# Altium PCB PCBm.PcbDoc
Units mm, origin at the board's own origin, x right, y up, seen from the top; angles counter-clockwise.
Board outline 50 x 50 mm, 2 copper layers (Top Layer, Bottom Layer); 168 components, 12 nets, 420 pads, 0 vias.
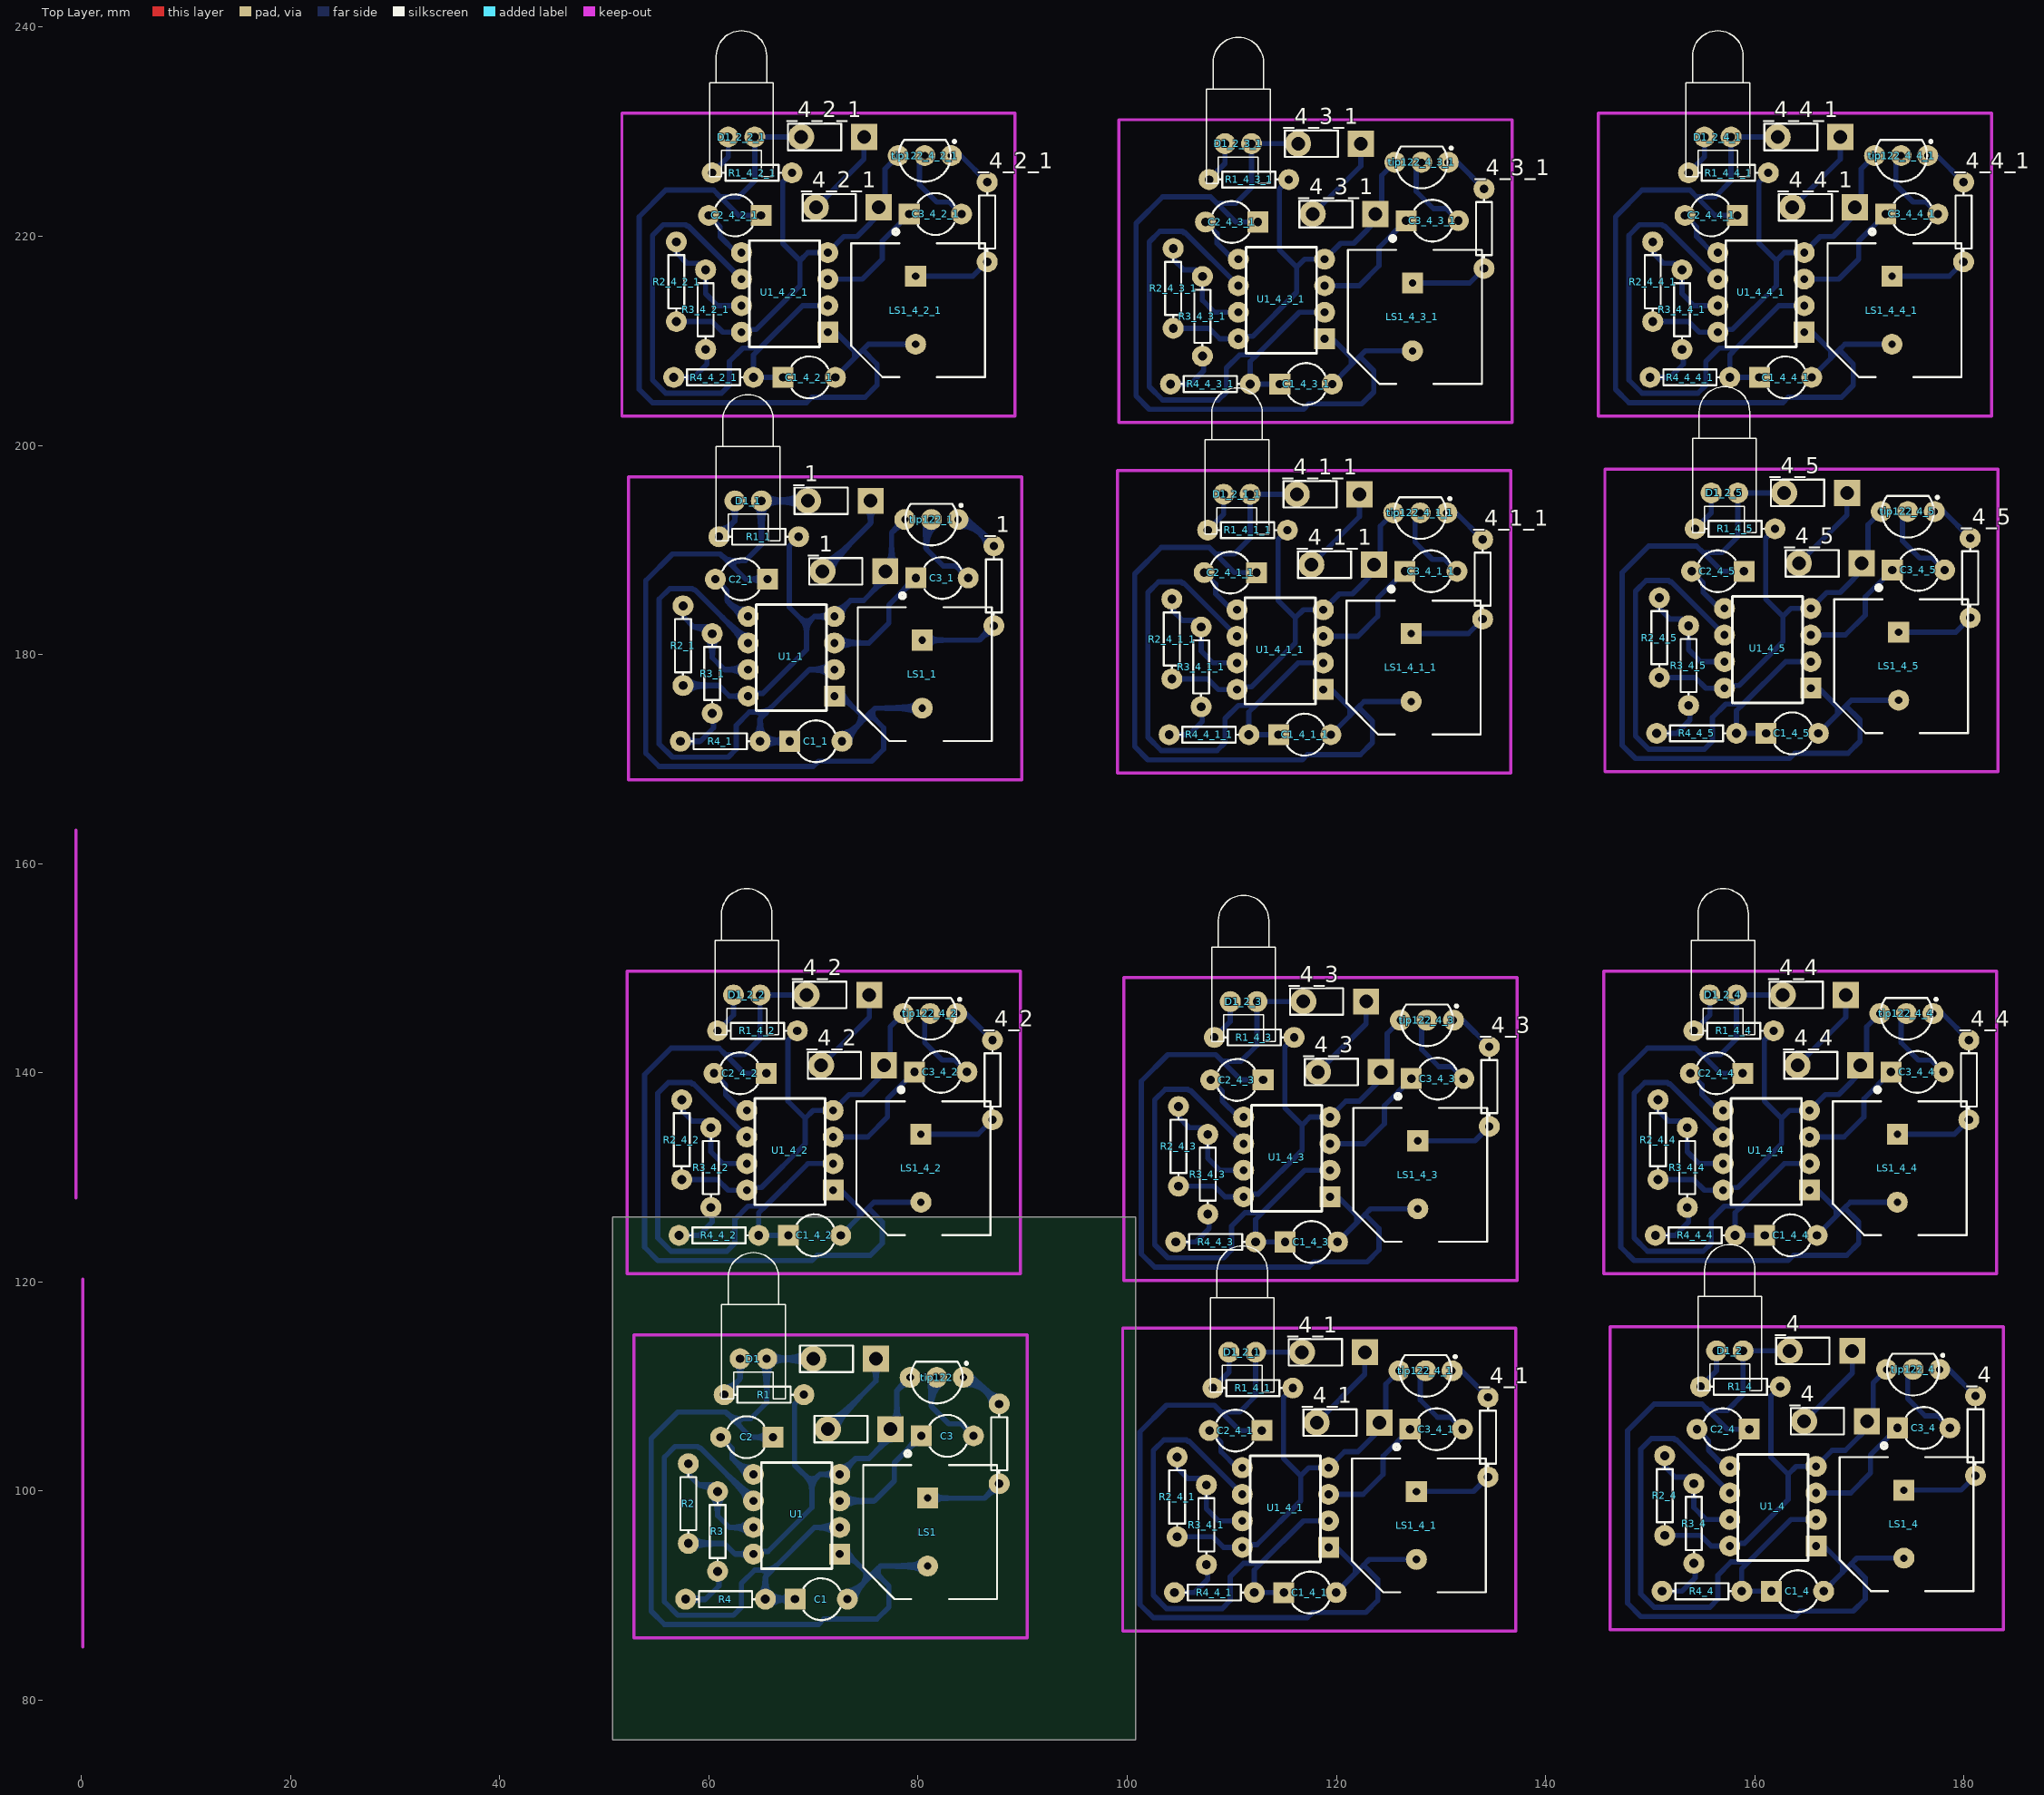
[diagram p0: Top Layer view]
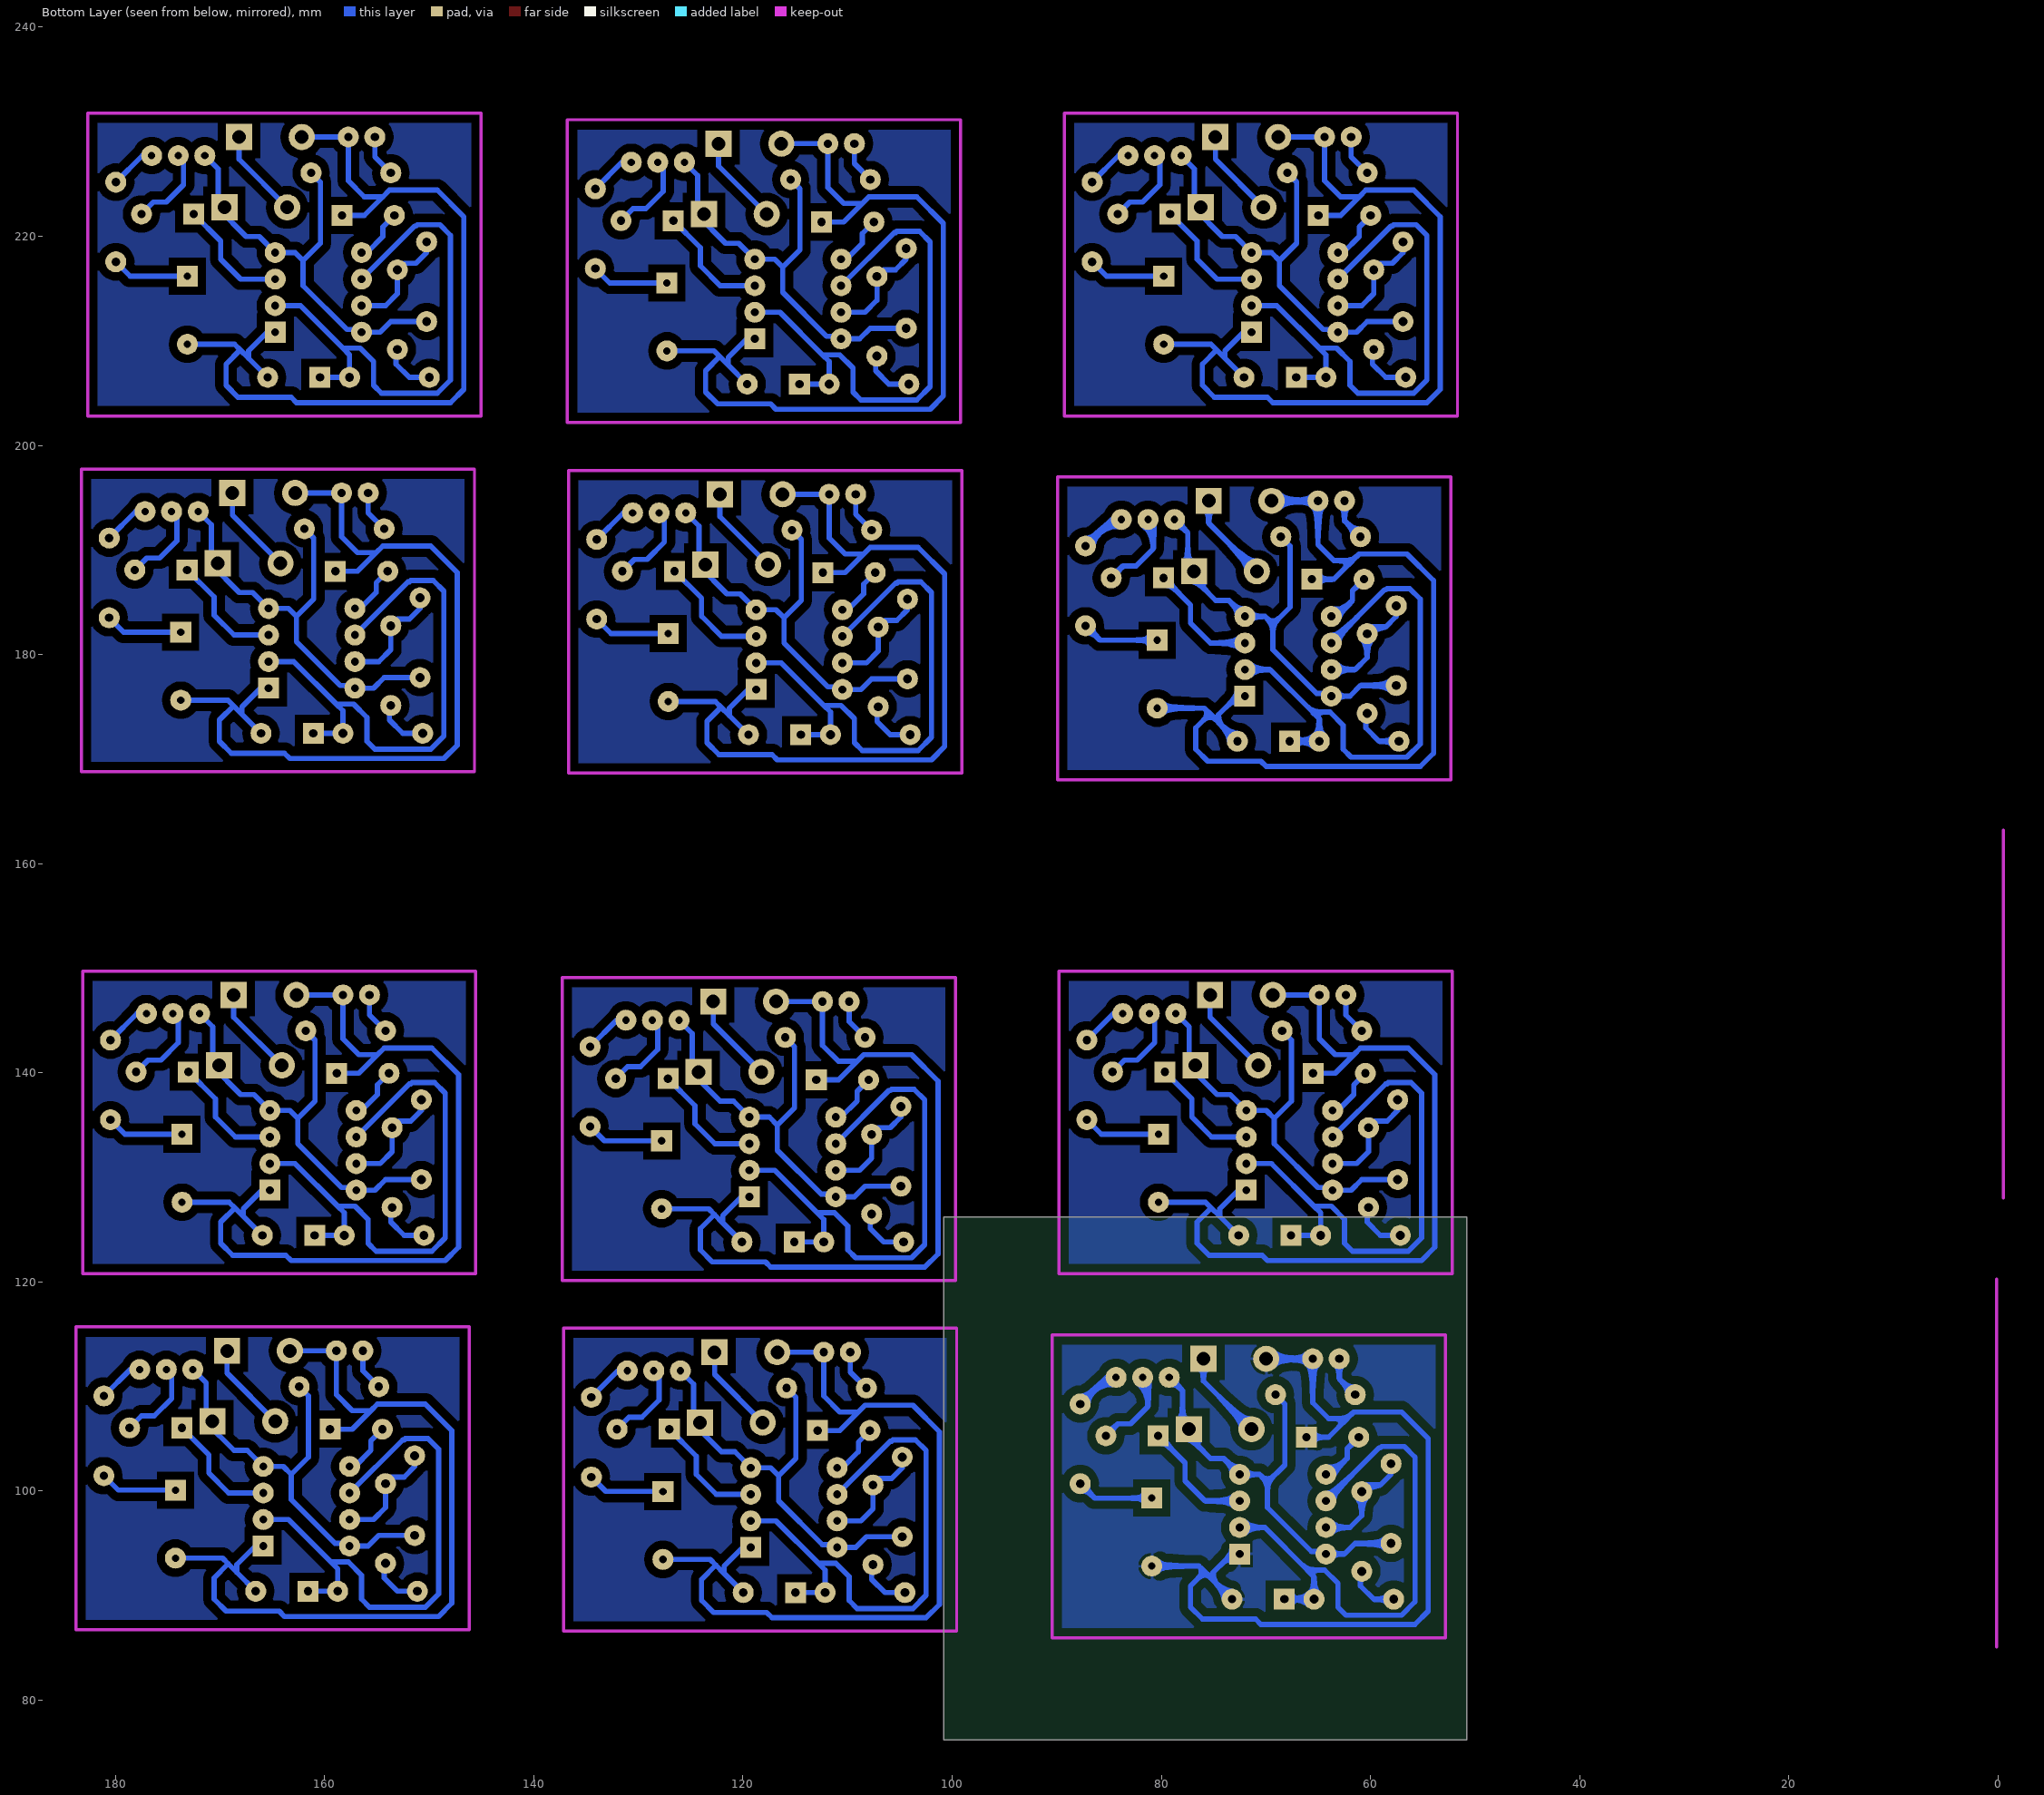
[diagram p1: Bottom Layer view, seen from below]

## Layer stack, top to bottom
Top Solder: solder mask 0.0102, Solder Resist, Dk 3.5
Top Layer: signal copper 0.0356
Dielectric 1: dielectric 0.32, FR-4, Dk 4.8
Bottom Layer: signal copper 0.0356
Bottom Solder: solder mask 0.0102, Solder Resist, Dk 3.5

## Board outline
50.8,76.2 100.8,76.2 100.8,126.2 50.8,126.2

## Design rules (kind name [scope] priority, off if disabled: settings)
Clearance Clearance_1 [All] p1: gap=0.8
Clearance [All] p2: gap=0.8
PolygonConnect [All] p1: connectstyle=Relief reliefconductorwidth=0.254 reliefentries=4 polygonreliefangle="90 Angle" airgapwidth=0.254
RoomDefinition Sheet2 [InComponentClass('Sheet2')] p1: confinementstyle=ConfineIn formatcopy=TRUE lockcomponents=FALSE outline 0,0 50.8,0 50.8,25.4 0,25.4
RoutingVias [All] p1: holewidth=0.8 width=1.6 viastyle="Through Hole" minholewidth=0.711 minwidth=1.27 maxholewidth=0.711 maxwidth=1.27
SolderMaskExpansion [All] p1: expansion=0.102
UnpouredPolygon [All] p1: allowunpoured=FALSE
Width [All] p1: maxlimit=0.5 minlimit=0.5 preferedwidth=0.5
29 further rules are at their usual default settings.

## Classes and differential pairs
component class Sheet2: tip122

## Components (designator, comment, footprint, x,y, rotation, side; value= is the part's Value field where it differs from the comment)
_1 "Res5" AXIAL-0.3#1 87.249,186.563 r90 top
_1 "Header 2" HDR1X2 72.009,194.691 r180 top (schematic designator P1)
_1 "Header 2" HDR1X2 73.406,187.96 r180 top (schematic designator P2)
_4 "Res5" AXIAL-0.3#1 181.102,105.283 r90 top
_4 "Header 2" HDR1X2 165.862,113.411 r180 top (schematic designator P1)
_4 "Header 2" HDR1X2 167.259,106.68 r180 top (schematic designator P2)
_4_1 "Header 2" HDR1X2 120.65,106.553 r180 top (schematic designator P2)
_4_1 "Header 2" HDR1X2 119.253,113.284 r180 top (schematic designator P1)
_4_1 "Res5" AXIAL-0.3#1 134.493,105.156 r90 top
_4_1_1 "Res5" AXIAL-0.3#1 133.985,187.198 r90 top
_4_1_1 "Header 2" HDR1X2 118.745,195.326 r180 top (schematic designator P1)
_4_1_1 "Header 2" HDR1X2 120.142,188.595 r180 top (schematic designator P2)
_4_2 "Header 2" HDR1X2 73.279,140.716 r180 top (schematic designator P2)
_4_2 "Header 2" HDR1X2 71.882,147.447 r180 top (schematic designator P1)
_4_2 "Res5" AXIAL-0.3#1 87.122,139.319 r90 top
_4_2_1 "Res5" AXIAL-0.3#1 86.614,221.361 r90 top
_4_2_1 "Header 2" HDR1X2 71.374,229.489 r180 top (schematic designator P1)
_4_2_1 "Header 2" HDR1X2 72.771,222.758 r180 top (schematic designator P2)
_4_3 "Header 2" HDR1X2 120.777,140.081 r180 top (schematic designator P2)
_4_3 "Header 2" HDR1X2 119.38,146.812 r180 top (schematic designator P1)
_4_3 "Res5" AXIAL-0.3#1 134.62,138.684 r90 top
_4_3_1 "Res5" AXIAL-0.3#1 134.112,220.726 r90 top
_4_3_1 "Header 2" HDR1X2 118.872,228.854 r180 top (schematic designator P1)
_4_3_1 "Header 2" HDR1X2 120.269,222.123 r180 top (schematic designator P2)
_4_4 "Header 2" HDR1X2 166.624,140.716 r180 top (schematic designator P2)
_4_4 "Header 2" HDR1X2 165.227,147.447 r180 top (schematic designator P1)
_4_4 "Res5" AXIAL-0.3#1 180.467,139.319 r90 top
_4_4_1 "Res5" AXIAL-0.3#1 179.959,221.361 r90 top
_4_4_1 "Header 2" HDR1X2 164.719,229.489 r180 top (schematic designator P1)
_4_4_1 "Header 2" HDR1X2 166.116,222.758 r180 top (schematic designator P2)
_4_5 "Header 2" HDR1X2 166.751,188.722 r180 top (schematic designator P2)
_4_5 "Header 2" HDR1X2 165.354,195.453 r180 top (schematic designator P1)
_4_5 "Res5" AXIAL-0.3#1 180.594,187.325 r90 top
C1 "Cap2" CAPR5-4X5 70.739,89.662 r0 top
C1_1 "Cap2" CAPR5-4X5 70.231,171.704 r0 top (schematic designator C1)
C1_4 "Cap2" CAPR5-4X5 164.084,90.424 r0 top (schematic designator C1)
C1_4_1 "Cap2" CAPR5-4X5 117.475,90.297 r0 top (schematic designator C1)
C1_4_1_1 "Cap2" CAPR5-4X5 116.967,172.339 r0 top (schematic designator C1)
C1_4_2 "Cap2" CAPR5-4X5 70.104,124.46 r0 top (schematic designator C1)
C1_4_2_1 "Cap2" CAPR5-4X5 69.596,206.502 r0 top (schematic designator C1)
C1_4_3 "Cap2" CAPR5-4X5 117.602,123.825 r0 top (schematic designator C1)
C1_4_3_1 "Cap2" CAPR5-4X5 117.094,205.867 r0 top (schematic designator C1)
C1_4_4 "Cap2" CAPR5-4X5 163.449,124.46 r0 top (schematic designator C1)
C1_4_4_1 "Cap2" CAPR5-4X5 162.941,206.502 r0 top (schematic designator C1)
C1_4_5 "Cap2" CAPR5-4X5 163.576,172.466 r0 top (schematic designator C1)
C2 "Cap2" CAPR5-4X5 63.627,105.156 r180 top
C2_1 "Cap2" CAPR5-4X5 63.119,187.198 r180 top (schematic designator C2)
C2_4 "Cap2" CAPR5-4X5 156.972,105.918 r180 top (schematic designator C2)
C2_4_1 "Cap2" CAPR5-4X5 110.363,105.791 r180 top (schematic designator C2)
C2_4_1_1 "Cap2" CAPR5-4X5 109.855,187.833 r180 top (schematic designator C2)
C2_4_2 "Cap2" CAPR5-4X5 62.992,139.954 r180 top (schematic designator C2)
C2_4_2_1 "Cap2" CAPR5-4X5 62.484,221.996 r180 top (schematic designator C2)
C2_4_3 "Cap2" CAPR5-4X5 110.49,139.319 r180 top (schematic designator C2)
C2_4_3_1 "Cap2" CAPR5-4X5 109.982,221.361 r180 top (schematic designator C2)
C2_4_4 "Cap2" CAPR5-4X5 156.337,139.954 r180 top (schematic designator C2)
C2_4_4_1 "Cap2" CAPR5-4X5 155.829,221.996 r180 top (schematic designator C2)
C2_4_5 "Cap2" CAPR5-4X5 156.464,187.96 r180 top (schematic designator C2)
C3 "Cap2" CAPR5-4X5 82.804,105.283 r0 top
C3_1 "Cap2" CAPR5-4X5 82.296,187.325 r0 top (schematic designator C3)
C3_4 "Cap2" CAPR5-4X5 176.149,106.045 r0 top (schematic designator C3)
C3_4_1 "Cap2" CAPR5-4X5 129.54,105.918 r0 top (schematic designator C3)
C3_4_1_1 "Cap2" CAPR5-4X5 129.032,187.96 r0 top (schematic designator C3)
C3_4_2 "Cap2" CAPR5-4X5 82.169,140.081 r0 top (schematic designator C3)
C3_4_2_1 "Cap2" CAPR5-4X5 81.661,222.123 r0 top (schematic designator C3)
C3_4_3 "Cap2" CAPR5-4X5 129.667,139.446 r0 top (schematic designator C3)
C3_4_3_1 "Cap2" CAPR5-4X5 129.159,221.488 r0 top (schematic designator C3)
C3_4_4 "Cap2" CAPR5-4X5 175.514,140.081 r0 top (schematic designator C3)
C3_4_4_1 "Cap2" CAPR5-4X5 175.006,222.123 r0 top (schematic designator C3)
C3_4_5 "Cap2" CAPR5-4X5 175.641,188.087 r0 top (schematic designator C3)
D1 "LED0" LED-0 64.262,112.649 r180 top
D1_1 "LED0" LED-0 63.754,194.691 r180 top (schematic designator D1)
D1_2 "LED0" LED-0 157.607,113.411 r180 top (schematic designator D1)
D1_2_1 "LED0" LED-0 110.998,113.284 r180 top (schematic designator D1)
D1_2_1_1 "LED0" LED-0 110.49,195.326 r180 top (schematic designator D1)
D1_2_2 "LED0" LED-0 63.627,147.447 r180 top (schematic designator D1)
D1_2_2_1 "LED0" LED-0 63.119,229.489 r180 top (schematic designator D1)
D1_2_3 "LED0" LED-0 111.125,146.812 r180 top (schematic designator D1)
D1_2_3_1 "LED0" LED-0 110.617,228.854 r180 top (schematic designator D1)
D1_2_4 "LED0" LED-0 156.972,147.447 r180 top (schematic designator D1)
D1_2_4_1 "LED0" LED-0 156.464,229.489 r180 top (schematic designator D1)
D1_2_5 "LED0" LED-0 157.099,195.453 r180 top (schematic designator D1)
LS1 "Buzzer" ABSM-1574 81.153,101.981 r270 top
LS1_1 "Buzzer" ABSM-1574 80.645,184.023 r270 top (schematic designator LS1)
LS1_4 "Buzzer" ABSM-1574 174.498,102.743 r270 top (schematic designator LS1)
LS1_4_1 "Buzzer" ABSM-1574 127.889,102.616 r270 top (schematic designator LS1)
LS1_4_1_1 "Buzzer" ABSM-1574 127.381,184.658 r270 top (schematic designator LS1)
LS1_4_2 "Buzzer" ABSM-1574 80.518,136.779 r270 top (schematic designator LS1)
LS1_4_2_1 "Buzzer" ABSM-1574 80.01,218.821 r270 top (schematic designator LS1)
LS1_4_3 "Buzzer" ABSM-1574 128.016,136.144 r270 top (schematic designator LS1)
LS1_4_3_1 "Buzzer" ABSM-1574 127.508,218.186 r270 top (schematic designator LS1)
LS1_4_4 "Buzzer" ABSM-1574 173.863,136.779 r270 top (schematic designator LS1)
LS1_4_4_1 "Buzzer" ABSM-1574 173.355,218.821 r270 top (schematic designator LS1)
LS1_4_5 "Buzzer" ABSM-1574 173.99,184.785 r270 top (schematic designator LS1)
P1 "Header 2" HDR1X2 72.517,112.649 r180 top
P2 "Header 2" HDR1X2 73.914,105.918 r180 top
R1 "Res1" AXIAL-0.3#1 65.278,109.22 r0 top
R1_1 "Res1" AXIAL-0.3#1 64.77,191.262 r0 top (schematic designator R1)
R1_4 "Res1" AXIAL-0.3#1 158.623,109.982 r0 top (schematic designator R1)
R1_4_1 "Res1" AXIAL-0.3#1 112.014,109.855 r0 top (schematic designator R1)
R1_4_1_1 "Res1" AXIAL-0.3#1 111.506,191.897 r0 top (schematic designator R1)
R1_4_2 "Res1" AXIAL-0.3#1 64.643,144.018 r0 top (schematic designator R1)
R1_4_2_1 "Res1" AXIAL-0.3#1 64.135,226.06 r0 top (schematic designator R1)
R1_4_3 "Res1" AXIAL-0.3#1 112.141,143.383 r0 top (schematic designator R1)
R1_4_3_1 "Res1" AXIAL-0.3#1 111.633,225.425 r0 top (schematic designator R1)
R1_4_4 "Res1" AXIAL-0.3#1 157.988,144.018 r0 top (schematic designator R1)
R1_4_4_1 "Res1" AXIAL-0.3#1 157.48,226.06 r0 top (schematic designator R1)
R1_4_5 "Res1" AXIAL-0.3#1 158.115,192.024 r0 top (schematic designator R1)
R2 "Res1" AXIAL-0.3#2 58.039,98.806 r270 top
R2_1 "Res1" AXIAL-0.3#2 57.531,180.848 r270 top (schematic designator R2)
R2_4 "Res1" AXIAL-0.3#2 151.384,99.568 r270 top (schematic designator R2)
R2_4_1 "Res1" AXIAL-0.3#2 104.775,99.441 r270 top (schematic designator R2)
R2_4_1_1 "Res1" AXIAL-0.3#2 104.267,181.483 r270 top (schematic designator R2)
R2_4_2 "Res1" AXIAL-0.3#2 57.404,133.604 r270 top (schematic designator R2)
R2_4_2_1 "Res1" AXIAL-0.3#2 56.896,215.646 r270 top (schematic designator R2)
R2_4_3 "Res1" AXIAL-0.3#2 104.902,132.969 r270 top (schematic designator R2)
R2_4_3_1 "Res1" AXIAL-0.3#2 104.394,215.011 r270 top (schematic designator R2)
R2_4_4 "Res1" AXIAL-0.3#2 150.749,133.604 r270 top (schematic designator R2)
R2_4_4_1 "Res1" AXIAL-0.3#2 150.241,215.646 r270 top (schematic designator R2)
R2_4_5 "Res1" AXIAL-0.3#2 150.876,181.61 r270 top (schematic designator R2)
R3 "Res1" AXIAL-0.3#2 60.833,96.139 r90 top
R3_1 "Res1" AXIAL-0.3#2 60.325,178.181 r90 top (schematic designator R3)
R3_4 "Res1" AXIAL-0.3#2 154.178,96.901 r90 top (schematic designator R3)
R3_4_1 "Res1" AXIAL-0.3#2 107.569,96.774 r90 top (schematic designator R3)
R3_4_1_1 "Res1" AXIAL-0.3#2 107.061,178.816 r90 top (schematic designator R3)
R3_4_2 "Res1" AXIAL-0.3#2 60.198,130.937 r90 top (schematic designator R3)
R3_4_2_1 "Res1" AXIAL-0.3#2 59.69,212.979 r90 top (schematic designator R3)
R3_4_3 "Res1" AXIAL-0.3#2 107.696,130.302 r90 top (schematic designator R3)
R3_4_3_1 "Res1" AXIAL-0.3#2 107.188,212.344 r90 top (schematic designator R3)
R3_4_4 "Res1" AXIAL-0.3#2 153.543,130.937 r90 top (schematic designator R3)
R3_4_4_1 "Res1" AXIAL-0.3#2 153.035,212.979 r90 top (schematic designator R3)
R3_4_5 "Res1" AXIAL-0.3#2 153.67,178.943 r90 top (schematic designator R3)
R4 "Res5" AXIAL-0.3#2 61.595,89.662 r180 top
R4_1 "Res5" AXIAL-0.3#2 61.087,171.704 r180 top (schematic designator R4)
R4_4 "Res5" AXIAL-0.3#2 154.94,90.424 r180 top (schematic designator R4)
R4_4_1 "Res5" AXIAL-0.3#2 108.331,90.297 r180 top (schematic designator R4)
R4_4_1_1 "Res5" AXIAL-0.3#2 107.823,172.339 r180 top (schematic designator R4)
R4_4_2 "Res5" AXIAL-0.3#2 60.96,124.46 r180 top (schematic designator R4)
R4_4_2_1 "Res5" AXIAL-0.3#2 60.452,206.502 r180 top (schematic designator R4)
R4_4_3 "Res5" AXIAL-0.3#2 108.458,123.825 r180 top (schematic designator R4)
R4_4_3_1 "Res5" AXIAL-0.3#2 107.95,205.867 r180 top (schematic designator R4)
R4_4_4 "Res5" AXIAL-0.3#2 154.305,124.46 r180 top (schematic designator R4)
R4_4_4_1 "Res5" AXIAL-0.3#2 153.797,206.502 r180 top (schematic designator R4)
R4_4_5 "Res5" AXIAL-0.3#2 154.432,172.466 r180 top (schematic designator R4)
tip122 "2N3904" TO-92A 81.788,110.871 r90 top
tip122_1 "2N3904" TO-92A 81.28,192.913 r90 top (schematic designator tip122)
tip122_4 "2N3904" TO-92A 175.133,111.633 r90 top (schematic designator tip122)
tip122_4_1 "2N3904" TO-92A 128.524,111.506 r90 top (schematic designator tip122)
tip122_4_1_1 "2N3904" TO-92A 128.016,193.548 r90 top (schematic designator tip122)
tip122_4_2 "2N3904" TO-92A 81.153,145.669 r90 top (schematic designator tip122)
tip122_4_2_1 "2N3904" TO-92A 80.645,227.711 r90 top (schematic designator tip122)
tip122_4_3 "2N3904" TO-92A 128.651,145.034 r90 top (schematic designator tip122)
tip122_4_3_1 "2N3904" TO-92A 128.143,227.076 r90 top (schematic designator tip122)
tip122_4_4 "2N3904" TO-92A 174.498,145.669 r90 top (schematic designator tip122)
tip122_4_4_1 "2N3904" TO-92A 173.99,227.711 r90 top (schematic designator tip122)
tip122_4_5 "2N3904" TO-92A 174.625,193.675 r90 top (schematic designator tip122)
U1 "NE555" 555 71.882,92.456 r90 top
U1_1 "NE555" 555 71.374,174.498 r90 top (schematic designator U1)
U1_4 "NE555" 555 165.227,93.218 r90 top (schematic designator U1)
U1_4_1 "NE555" 555 118.618,93.091 r90 top (schematic designator U1)
U1_4_1_1 "NE555" 555 118.11,175.133 r90 top (schematic designator U1)
U1_4_2 "NE555" 555 71.247,127.254 r90 top (schematic designator U1)
U1_4_2_1 "NE555" 555 70.739,209.296 r90 top (schematic designator U1)
U1_4_3 "NE555" 555 118.745,126.619 r90 top (schematic designator U1)
U1_4_3_1 "NE555" 555 118.237,208.661 r90 top (schematic designator U1)
U1_4_4 "NE555" 555 164.592,127.254 r90 top (schematic designator U1)
U1_4_4_1 "NE555" 555 164.084,209.296 r90 top (schematic designator U1)
U1_4_5 "NE555" 555 164.719,175.26 r90 top (schematic designator U1)
? "Res5" AXIAL-0.3#1 87.757,104.521 r90 top

## Footprints (in the part's own frame and the unit in brackets; to place one, negate y for a bottom-side part, rotate by r counter-clockwise, add the part's x,y. Pads: shape width x height; smd on the part's side, far side on the other; paste and mask are expansions set on the pad)
555 [mm]
  rect 2x2 hole 0.762: 1(1.524,-0.635)
  round 2 hole 0.762: 2(4.064,-0.635) 3(6.604,-0.635) 4(9.144,-0.635) 5(9.144,7.62) 6(6.604,7.62) 7(4.064,7.62) 8(1.524,7.62)
  silkscreen extent 0.13,0.13 10.29,6.86
ABSM-1574 [mm] "Magnetic Transducer Buzzer"
  rect 2x2 hole 0.7: 1A(2.65,-0.24)
  round 2 hole 0.7: 2A(9.15,-0.24)
  silkscreen extent -1.83,-6.4 12.3,6.4
AXIAL-0.3#1 [mm] "Axial Device, Thru-Hole; 2 Leads; 0.3 in Pin Spacing"
  round 2 hole 0.8: 1(-3.81,0) 2(3.81,0)
  silkscreen extent -2.77,-0.76 2.77,0.76
AXIAL-0.3#2 [mm] "Axial Device, Thru-Hole; 2 Leads; 0.3 in Pin Spacing"
  round 2 hole 0.85: 1(-3.81,0) 2(3.81,0)
  silkscreen extent -2.77,-0.76 2.77,0.76
CAPR5-4X5 [mm] "Capacitor; 2 Leads"
  rect 2x2 hole 0.8: 1(-2.5,0)
  round 2 hole 0.8: 2(2.5,0)
  silkscreen extent -1.69,-2 1.82,2
HDR1X2 [mm] "Connector; Header; 2 Position"
  rect 2.5x2.5 hole 1.3: 1(-3.46,0)
  round 2.5 hole 1.3: 2(2.54,0)
  silkscreen extent -1.27,-1.27 3.81,1.27
LED-0 [mm] "LED; 2 Leads"
  round 2 hole 0.8: 1(1.27,0) 2(-1.27,0)
  silkscreen extent -3.05,-10.16 3.05,3.81
TO-92A [mm] "TO, Flat Index; 3 In-Line, Axial Leads; Body Dia. 4.5mm; Leads 0.51 x 0.48 mm (max)"
  round 2 hole 0.7: 1(0,-2.54) 2(0,0) 3(0,2.54)
  silkscreen extent -2.48,-2.96 1.5,2.48, body extent -2.5,-2.5 1.5,2.5, height 6.86

## Part data
_1 _4 _4_1 _4_1_1 _4_2 _4_2_1 _4_3 _4_3_1 _4_4 _4_4_1 _4_5 R4 R4_1 R4_4 R4_4_1 R4_4_1_1 R4_4_2 R4_4_2_1 R4_4_3 R4_4_3_1 R4_4_4 R4_4_4_1 R4_4_5 ?: library part Res1, "Resistor"
_1 _1 _4 _4 _4_1 _4_1 _4_1_1 _4_1_1 _4_2 _4_2 _4_2_1 _4_2_1 _4_3 _4_3 _4_3_1 _4_3_1 _4_4 _4_4 _4_4_1 _4_4_1 _4_5 _4_5 P1 P2: "Header, 2-Pin"
C1 C1_1 C1_4 C1_4_1 C1_4_1_1 C1_4_2 C1_4_2_1 C1_4_3 C1_4_3_1 C1_4_4 C1_4_4_1 C1_4_5 C2 C2_1 C2_4 C2_4_1 C2_4_1_1 C2_4_2 C2_4_2_1 C2_4_3 C2_4_3_1 C2_4_4 C2_4_4_1 C2_4_5 C3 C3_1 C3_4 C3_4_1 C3_4_1_1 C3_4_2 C3_4_2_1 C3_4_3 C3_4_3_1 C3_4_4 C3_4_4_1 C3_4_5: "Capacitor"
D1 D1_1 D1_2 D1_2_1 D1_2_1_1 D1_2_2 D1_2_2_1 D1_2_3 D1_2_3_1 D1_2_4 D1_2_4_1 D1_2_5: "Typical INFRARED GaAs LED"
LS1 LS1_1 LS1_4 LS1_4_1 LS1_4_1_1 LS1_4_2 LS1_4_2_1 LS1_4_3 LS1_4_3_1 LS1_4_4 LS1_4_4_1 LS1_4_5: "Magnetic Transducer Buzzer"
R1 R1_1 R1_4 R1_4_1 R1_4_1_1 R1_4_2 R1_4_2_1 R1_4_3 R1_4_3_1 R1_4_4 R1_4_4_1 R1_4_5 R2 R2_1 R2_4 R2_4_1 R2_4_1_1 R2_4_2 R2_4_2_1 R2_4_3 R2_4_3_1 R2_4_4 R2_4_4_1 R2_4_5 R3 R3_1 R3_4 R3_4_1 R3_4_1_1 R3_4_2 R3_4_2_1 R3_4_3 R3_4_3_1 R3_4_4 R3_4_4_1 R3_4_5: "Resistor"
tip122 tip122_1 tip122_4 tip122_4_1 tip122_4_1_1 tip122_4_2 tip122_4_2_1 tip122_4_3 tip122_4_3_1 tip122_4_4 tip122_4_4_1 tip122_4_5: "NPN General Purpose Amplifier"
U1 U1_1 U1_4 U1_4_1 U1_4_1_1 U1_4_2 U1_4_2_1 U1_4_3 U1_4_3_1 U1_4_4 U1_4_4_1 U1_4_5: library part 555

## Nets (pads, with @x,y where several pads share a name; then routed paths per layer and width w, separated by ;. In a path a pad name is that pad's centre, name@x,y a point inside that pad or via, vN(x,y) a via of type N, cw(c..) or ccw(c..) an arc to the next point about the centre after c; other vN are vias at no path point)
GND: C1.2 C2.1 D1.2 LS1.2A P1.2 U1.1 | length 83.6
  Bottom Layer w0.5: C2.1 64.008,105.156 62.23,106.934 ; P1.2 D1.2 65.532,108.458 64.008,106.934 62.23,106.934 ; U1.1 73.279,93.98 75.057,92.202 75.057,91.48 ; C1.2 75.057,91.48 ; LS1.2A 76.408,92.831 75.863,92.285 ; 62.23,106.934 61.595,107.569 57.023,107.569 54.483,105.029 54.483,88.519 55.753,87.249 70.485,87.249 70.993,87.757 76.073,87.757 77.216,88.9 77.216,90.932 75.863,92.285 ; 75.057,91.48 75.863,92.285
Net_1: P2.1 R1.2 R2.2 tip122.3 U1.4 U1.8 | length 41.7
  Bottom Layer w0.5: R2.2 61.468,94.996 62.484,93.98 U1.8 64.516,94.234 65.659,94.234 69.85,98.425 69.85,100.838 ; R1.2 68.199,108.331 68.199,102.489 69.85,100.838 ; tip122.3 77.978,109.601 77.978,105.791 75.311,103.124 74.041,103.124 U1.4 70.612,101.6 69.85,100.838
Net_1: ?.1 LS1.1A | length 7.4
  Bottom Layer w0.5: LS1.1A 86.377,99.331 ?.1
Net_2: ?.2 tip122.1 | length 4.5
  Bottom Layer w0.5: tip122.1 85.217,110.871 ?.2
NetC1_1: C1.1 R4.1 U1.2 U1.6 | length 52.9
  Bottom Layer w0.5: U1.6 59.182,104.14 59.055,104.14 58.928,104.267 56.769,104.267 55.753,103.251 55.753,89.408 57.023,88.138 62.357,88.138 63.119,88.9 63.119,91.186 64.389,92.456 66.04,92.456 ; C1.1 R4.1 65.405,91.821 66.04,92.456 ; U1.2 70.104,96.52 66.04,92.456
NetC2_2: C2.2 U1.5 | length 4.6
  Bottom Layer w0.5: C2.2 62.23,104.053 62.23,103.124 U1.5@63.754,101.6
NetC3_1: C3.1 U1.3 | length 11.4
  Bottom Layer w0.5: U1.3 75.819,99.06 77.724,100.965 77.724,102.703 C3.1
NetC3_2: C3.2 tip122.2 | length 7.5
  Bottom Layer w0.5: tip122.2@81.28,110.363 81.28,108.077 82.931,106.426 84.161,106.426 C3.2
NetD1_1: D1.1 R1.1 | length 4.1
  Bottom Layer w0.5: R1.1 62.992,110.744 D1.1
NetR2_1: R2.1 R3.2 U1.7 | length 10.7
  Bottom Layer w0.5: R2.1 58.039,101.6 59.055,100.584 60.198,100.584 R3.2 60.833,97.663 61.976,96.52 U1.7
NetR3_1: R3.1 R4.2 | length 5.2
  Bottom Layer w0.5: R4.2 59.69,89.662 60.96,90.932 60.96,92.202 R3.1
VCC: P1.1 P2.2 | length 8.6
  Bottom Layer w0.5: P2.2 75.977,110.521 P1.1
pads on no net: _1.1 _1.2 _4.1 _4.2 _4_1.1 _4_1.2 _4_1_1.1 _4_1_1.2 _4_2.1 _4_2.2 _4_2_1.1 _4_2_1.2 _4_3.1 _4_3.2 _4_3_1.1 _4_3_1.2 _4_4.1 _4_4.2 _4_4_1.1 _4_4_1.2 _4_5.1 _4_5.2 C1_1.1 C1_1.2 C1_4.1 C1_4.2 C1_4_1.1 C1_4_1.2 C1_4_1_1.1 C1_4_1_1.2 C1_4_2.1 C1_4_2.2 C1_4_2_1.1 C1_4_2_1.2 C1_4_3.1 C1_4_3.2 C1_4_3_1.1 C1_4_3_1.2 C1_4_4.1 C1_4_4.2 C1_4_4_1.1 C1_4_4_1.2 C1_4_5.1 C1_4_5.2 C2_1.1 C2_1.2 C2_4.1 C2_4.2 C2_4_1.1 C2_4_1.2 C2_4_1_1.1 C2_4_1_1.2 C2_4_2.1 C2_4_2.2 C2_4_2_1.1 C2_4_2_1.2 C2_4_3.1 C2_4_3.2 C2_4_3_1.1 C2_4_3_1.2 C2_4_4.1 C2_4_4.2 C2_4_4_1.1 C2_4_4_1.2 C2_4_5.1 C2_4_5.2 C3_1.1 C3_1.2 C3_4.1 C3_4.2 C3_4_1.1 C3_4_1.2 C3_4_1_1.1 C3_4_1_1.2 C3_4_2.1 C3_4_2.2 C3_4_2_1.1 C3_4_2_1.2 C3_4_3.1 C3_4_3.2 C3_4_3_1.1 C3_4_3_1.2 C3_4_4.1 C3_4_4.2 C3_4_4_1.1 C3_4_4_1.2 C3_4_5.1 C3_4_5.2 D1_1.1 D1_1.2 D1_2.1 D1_2.2 D1_2_1.1 D1_2_1.2 D1_2_1_1.1 D1_2_1_1.2 D1_2_2.1 D1_2_2.2 D1_2_2_1.1 D1_2_2_1.2 D1_2_3.1 D1_2_3.2 D1_2_3_1.1 D1_2_3_1.2 D1_2_4.1 D1_2_4.2 D1_2_4_1.1 D1_2_4_1.2 D1_2_5.1 D1_2_5.2 LS1_1.1A LS1_1.2A LS1_4.1A LS1_4.2A LS1_4_1.1A LS1_4_1.2A LS1_4_1_1.1A LS1_4_1_1.2A LS1_4_2.1A LS1_4_2.2A LS1_4_2_1.1A LS1_4_2_1.2A LS1_4_3.1A LS1_4_3.2A LS1_4_3_1.1A LS1_4_3_1.2A LS1_4_4.1A LS1_4_4.2A LS1_4_4_1.1A LS1_4_4_1.2A LS1_4_5.1A LS1_4_5.2A R1_1.1 R1_1.2 R1_4.1 R1_4.2 R1_4_1.1 R1_4_1.2 R1_4_1_1.1 R1_4_1_1.2 R1_4_2.1 R1_4_2.2 R1_4_2_1.1 R1_4_2_1.2 R1_4_3.1 R1_4_3.2 R1_4_3_1.1 R1_4_3_1.2 R1_4_4.1 R1_4_4.2 R1_4_4_1.1 R1_4_4_1.2 R1_4_5.1 R1_4_5.2 R2_1.1 R2_1.2 R2_4.1 R2_4.2 R2_4_1.1 R2_4_1.2 R2_4_1_1.1 R2_4_1_1.2 R2_4_2.1 R2_4_2.2 R2_4_2_1.1 R2_4_2_1.2 R2_4_3.1 R2_4_3.2 R2_4_3_1.1 R2_4_3_1.2 R2_4_4.1 R2_4_4.2 R2_4_4_1.1 R2_4_4_1.2 R2_4_5.1 R2_4_5.2 R3_1.1 R3_1.2 R3_4.1 R3_4.2 R3_4_1.1 R3_4_1.2 R3_4_1_1.1 R3_4_1_1.2 R3_4_2.1 R3_4_2.2 R3_4_2_1.1 R3_4_2_1.2 R3_4_3.1 R3_4_3.2 R3_4_3_1.1 R3_4_3_1.2 R3_4_4.1 R3_4_4.2 R3_4_4_1.1 R3_4_4_1.2 R3_4_5.1 R3_4_5.2 R4_1.1 R4_1.2 R4_4.1 R4_4.2 R4_4_1.1 R4_4_1.2 R4_4_1_1.1 R4_4_1_1.2 R4_4_2.1 R4_4_2.2 R4_4_2_1.1 R4_4_2_1.2 R4_4_3.1 R4_4_3.2 R4_4_3_1.1 R4_4_3_1.2 R4_4_4.1 R4_4_4.2 R4_4_4_1.1 R4_4_4_1.2 R4_4_5.1 R4_4_5.2 tip122_1.1 tip122_1.2 tip122_1.3 tip122_4.1 tip122_4.2 tip122_4.3 tip122_4_1.1 tip122_4_1.2 tip122_4_1.3 tip122_4_1_1.1 tip122_4_1_1.2 tip122_4_1_1.3 tip122_4_2.1 tip122_4_2.2 tip122_4_2.3 tip122_4_2_1.1 tip122_4_2_1.2 tip122_4_2_1.3 tip122_4_3.1 tip122_4_3.2 tip122_4_3.3 tip122_4_3_1.1 tip122_4_3_1.2 tip122_4_3_1.3 tip122_4_4.1 tip122_4_4.2 tip122_4_4.3 tip122_4_4_1.1 tip122_4_4_1.2 tip122_4_4_1.3 tip122_4_5.1 tip122_4_5.2 tip122_4_5.3 U1_1.1 U1_1.2 U1_1.3 U1_1.4 U1_1.5 U1_1.6 U1_1.7 U1_1.8 U1_4.1 U1_4.2 U1_4.3 U1_4.4 U1_4.5 U1_4.6 U1_4.7 U1_4.8 U1_4_1.1 U1_4_1.2 U1_4_1.3 U1_4_1.4 U1_4_1.5 U1_4_1.6 U1_4_1.7 U1_4_1.8 U1_4_1_1.1 U1_4_1_1.2 U1_4_1_1.3 U1_4_1_1.4 U1_4_1_1.5 U1_4_1_1.6 U1_4_1_1.7 U1_4_1_1.8 U1_4_2.1 U1_4_2.2 U1_4_2.3 U1_4_2.4 U1_4_2.5 U1_4_2.6 U1_4_2.7 U1_4_2.8 U1_4_2_1.1 U1_4_2_1.2 U1_4_2_1.3 U1_4_2_1.4 U1_4_2_1.5 U1_4_2_1.6 U1_4_2_1.7 U1_4_2_1.8 U1_4_3.1 U1_4_3.2 U1_4_3.3 U1_4_3.4 U1_4_3.5 U1_4_3.6 U1_4_3.7 U1_4_3.8 U1_4_3_1.1 U1_4_3_1.2 U1_4_3_1.3 U1_4_3_1.4 U1_4_3_1.5 U1_4_3_1.6 U1_4_3_1.7 U1_4_3_1.8 U1_4_4.1 U1_4_4.2 U1_4_4.3 U1_4_4.4 U1_4_4.5 U1_4_4.6 U1_4_4.7 U1_4_4.8 U1_4_4_1.1 U1_4_4_1.2 U1_4_4_1.3 U1_4_4_1.4 U1_4_4_1.5 U1_4_4_1.6 U1_4_4_1.7 U1_4_4_1.8 U1_4_5.1 U1_4_5.2 U1_4_5.3 U1_4_5.4 U1_4_5.5 U1_4_5.6 U1_4_5.7 U1_4_5.8
copper on no net: | length 2664.2
  Bottom Layer w0.5: 56.642,206.502 58.547,206.502 59.817,207.772 59.817,209.042 59.69,209.169 ; 56.896,211.836 60.325,211.836 61.341,210.82 63.119,210.82 63.373,211.074 64.516,211.074 68.707,215.265 68.707,217.678 ; 56.896,219.456 56.896,218.44 57.912,217.424 59.055,217.424 59.69,216.789 59.69,214.503 60.833,213.36 63.119,213.36 ; 57.15,124.46 59.055,124.46 60.325,125.73 60.325,127 60.198,127.127 ; 57.277,171.704 59.182,171.704 60.452,172.974 60.452,174.244 60.325,174.371 ; 57.404,129.794 60.833,129.794 61.849,128.778 63.627,128.778 63.881,129.032 65.024,129.032 69.215,133.223 69.215,135.636 ; 57.404,137.414 57.404,136.398 58.42,135.382 59.563,135.382 60.198,134.747 60.198,132.461 61.341,131.318 63.627,131.318 ; 57.531,177.038 60.96,177.038 61.976,176.022 63.754,176.022 64.008,176.276 65.151,176.276 69.342,180.467 69.342,182.88 ; 57.531,184.658 57.531,183.642 58.547,182.626 59.69,182.626 60.325,181.991 60.325,179.705 61.468,178.562 63.754,178.562 ; 59.984,221.996 61.087,220.893 61.087,219.964 62.611,218.44 ; 60.325,226.06 61.849,227.584 61.849,229.489 ; 60.492,139.954 61.595,138.851 61.595,137.922 63.119,136.398 ; 60.619,187.198 61.722,186.095 61.722,185.166 63.246,183.642 ; 60.833,144.018 62.357,145.542 62.357,147.447 ; 60.96,191.262 62.484,192.786 62.484,194.691 ; 63.119,215.9 58.039,220.98 57.912,220.98 57.785,221.107 55.626,221.107 54.61,220.091 54.61,206.248 55.88,204.978 61.214,204.978 61.976,205.74 61.976,208.026 63.246,209.296 64.897,209.296 ; 63.627,133.858 58.547,138.938 58.42,138.938 58.293,139.065 56.134,139.065 55.118,138.049 55.118,124.206 56.388,122.936 61.722,122.936 62.484,123.698 62.484,125.984 63.754,127.254 65.405,127.254 ; 63.754,181.102 58.674,186.182 58.547,186.182 58.42,186.309 56.261,186.309 55.245,185.293 55.245,171.45 56.515,170.18 61.849,170.18 62.611,170.942 62.611,173.228 63.881,174.498 65.532,174.498 ; 64.984,221.996 62.865,221.996 61.087,223.774 ; 65.492,139.954 63.373,139.954 61.595,141.732 ; 65.619,187.198 63.5,187.198 61.722,188.976 ; 67.096,206.502 64.262,206.502 64.262,208.661 64.897,209.296 ; 67.604,124.46 64.77,124.46 64.77,126.619 65.405,127.254 ; 67.731,171.704 64.897,171.704 64.897,173.863 65.532,174.498 ; 67.945,226.06 67.056,225.171 67.056,219.329 68.707,217.678 ; 68.453,144.018 67.564,143.129 67.564,137.287 69.215,135.636 ; 68.58,191.262 67.691,190.373 67.691,184.531 69.342,182.88 ; 68.834,229.489 64.389,229.489 64.389,225.298 62.865,223.774 61.087,223.774 ; 69.342,147.447 64.897,147.447 64.897,143.256 63.373,141.732 61.595,141.732 ; 69.469,194.691 65.024,194.691 65.024,190.5 63.5,188.976 61.722,188.976 ; 70.231,222.758 74.834,227.361 74.834,229.489 ; 70.739,140.716 75.342,145.319 75.342,147.447 ; 70.866,187.96 75.469,192.563 75.469,194.691 ; 71.374,210.82 72.136,210.82 73.914,209.042 73.914,208.32 ; 71.374,213.36 68.961,213.36 64.897,209.296 ; 71.374,215.9 74.676,215.9 76.581,217.805 76.581,219.543 79.161,222.123 ; 71.882,128.778 72.644,128.778 74.422,127 74.422,126.278 ; 71.882,131.318 69.469,131.318 65.405,127.254 ; 71.882,133.858 75.184,133.858 77.089,135.763 77.089,137.501 79.669,140.081 ; 72.009,176.022 72.771,176.022 74.549,174.244 74.549,173.522 ; 72.009,178.562 69.596,178.562 65.532,174.498 ; 72.009,181.102 75.311,181.102 77.216,183.007 77.216,184.745 79.796,187.325 ; 72.096,206.502 73.914,208.32 ; 72.604,124.46 74.422,126.278 ; 72.731,171.704 74.549,173.522 ; 78.105,227.711 76.835,226.441 76.835,222.631 74.168,219.964 72.898,219.964 71.374,218.44 69.469,218.44 68.707,217.678 ; 78.613,145.669 77.343,144.399 77.343,140.589 74.676,137.922 73.406,137.922 71.882,136.398 69.977,136.398 69.215,135.636 ; 78.74,192.913 77.47,191.643 77.47,187.833 74.803,185.166 73.533,185.166 72.009,183.642 70.104,183.642 69.342,182.88 ; 79.77,209.671 75.265,209.671 74.72,209.125 ; 79.77,216.171 85.234,216.171 86.614,217.551 ; 80.137,227.203 80.137,224.917 81.788,223.266 83.018,223.266 84.161,222.123 ; 80.278,127.629 75.773,127.629 75.228,127.083 ; 80.278,134.129 85.742,134.129 87.122,135.509 ; 80.405,174.873 75.9,174.873 75.355,174.327 ; 80.405,181.373 85.869,181.373 87.249,182.753 ; 80.645,145.161 80.645,142.875 82.296,141.224 83.526,141.224 84.669,140.081 ; 80.772,192.405 80.772,190.119 82.423,188.468 83.653,188.468 84.796,187.325 ; 83.185,227.711 84.074,227.711 86.614,225.171 ; 83.693,145.669 84.582,145.669 87.122,143.129 ; 83.82,192.913 84.709,192.913 87.249,190.373 ; 104.013,172.339 105.918,172.339 107.188,173.609 107.188,174.879 107.061,175.006 ; 104.14,205.867 106.045,205.867 107.315,207.137 107.315,208.407 107.188,208.534 ; 104.267,177.673 107.696,177.673 108.712,176.657 110.49,176.657 110.744,176.911 111.887,176.911 116.078,181.102 116.078,183.515 ; 104.267,185.293 104.267,184.277 105.283,183.261 106.426,183.261 107.061,182.626 107.061,180.34 108.204,179.197 110.49,179.197 ; 104.394,211.201 107.823,211.201 108.839,210.185 110.617,210.185 110.871,210.439 112.014,210.439 116.205,214.63 116.205,217.043 ; 104.394,218.821 104.394,217.805 105.41,216.789 106.553,216.789 107.188,216.154 107.188,213.868 108.331,212.725 110.617,212.725 ; 104.521,90.297 106.426,90.297 107.696,91.567 107.696,92.837 107.569,92.964 ; 104.648,123.825 106.553,123.825 107.823,125.095 107.823,126.365 107.696,126.492 ; 104.775,95.631 108.204,95.631 109.22,94.615 110.998,94.615 111.252,94.869 112.395,94.869 116.586,99.06 116.586,101.473 ; 104.775,103.251 104.775,102.235 105.791,101.219 106.934,101.219 107.569,100.584 107.569,98.298 108.712,97.155 110.998,97.155 ; 104.902,129.159 108.331,129.159 109.347,128.143 111.125,128.143 111.379,128.397 112.522,128.397 116.713,132.588 116.713,135.001 ; 104.902,136.779 104.902,135.763 105.918,134.747 107.061,134.747 107.696,134.112 107.696,131.826 108.839,130.683 111.125,130.683 ; 107.355,187.833 108.458,186.73 108.458,185.801 109.982,184.277 ; 107.482,221.361 108.585,220.258 108.585,219.329 110.109,217.805 ; 107.696,191.897 109.22,193.421 109.22,195.326 ; 107.823,225.425 109.347,226.949 109.347,228.854 ; 107.863,105.791 108.966,104.688 108.966,103.759 110.49,102.235 ; 107.99,139.319 109.093,138.216 109.093,137.287 110.617,135.763 ; 108.204,109.855 109.728,111.379 109.728,113.284 ; 108.331,143.383 109.855,144.907 109.855,146.812 ; 110.49,181.737 105.41,186.817 105.283,186.817 105.156,186.944 102.997,186.944 101.981,185.928 101.981,172.085 103.251,170.815 108.585,170.815 109.347,171.577 109.347,173.863 110.617,175.133 112.268,175.133 ; 110.617,215.265 105.537,220.345 105.41,220.345 105.283,220.472 103.124,220.472 102.108,219.456 102.108,205.613 103.378,204.343 108.712,204.343 109.474,205.105 109.474,207.391 110.744,208.661 112.395,208.661 ; 110.998,99.695 105.918,104.775 105.791,104.775 105.664,104.902 103.505,104.902 102.489,103.886 102.489,90.043 103.759,88.773 109.093,88.773 109.855,89.535 109.855,91.821 111.125,93.091 112.776,93.091 ; 111.125,133.223 106.045,138.303 105.918,138.303 105.791,138.43 103.632,138.43 102.616,137.414 102.616,123.571 103.886,122.301 109.22,122.301 109.982,123.063 109.982,125.349 111.252,126.619 112.903,126.619 ; 112.355,187.833 110.236,187.833 108.458,189.611 ; 112.482,221.361 110.363,221.361 108.585,223.139 ; 112.863,105.791 110.744,105.791 108.966,107.569 ; 112.99,139.319 110.871,139.319 109.093,141.097 ; 114.467,172.339 111.633,172.339 111.633,174.498 112.268,175.133 ; 114.594,205.867 111.76,205.867 111.76,208.026 112.395,208.661 ; 114.975,90.297 112.141,90.297 112.141,92.456 112.776,93.091 ; 115.102,123.825 112.268,123.825 112.268,125.984 112.903,126.619 ; 115.316,191.897 114.427,191.008 114.427,185.166 116.078,183.515 ; 115.443,225.425 114.554,224.536 114.554,218.694 116.205,217.043 ; 115.824,109.855 114.935,108.966 114.935,103.124 116.586,101.473 ; 115.951,143.383 115.062,142.494 115.062,136.652 116.713,135.001 ; 116.205,195.326 111.76,195.326 111.76,191.135 110.236,189.611 108.458,189.611 ; 116.332,228.854 111.887,228.854 111.887,224.663 110.363,223.139 108.585,223.139 ; 116.713,113.284 112.268,113.284 112.268,109.093 110.744,107.569 108.966,107.569 ; 116.84,146.812 112.395,146.812 112.395,142.621 110.871,141.097 109.093,141.097 ; 117.602,188.595 122.205,193.198 122.205,195.326 ; 117.729,222.123 122.332,226.726 122.332,228.854 ; 118.11,106.553 122.713,111.156 122.713,113.284 ; 118.237,140.081 122.84,144.684 122.84,146.812 ; 118.745,176.657 119.507,176.657 121.285,174.879 121.285,174.157 ; 118.745,179.197 116.332,179.197 112.268,175.133 ; 118.745,181.737 122.047,181.737 123.952,183.642 123.952,185.38 126.532,187.96 ; 118.872,210.185 119.634,210.185 121.412,208.407 121.412,207.685 ; 118.872,212.725 116.459,212.725 112.395,208.661 ; 118.872,215.265 122.174,215.265 124.079,217.17 124.079,218.908 126.659,221.488 ; 119.253,94.615 120.015,94.615 121.793,92.837 121.793,92.115 ; 119.253,97.155 116.84,97.155 112.776,93.091 ; 119.253,99.695 122.555,99.695 124.46,101.6 124.46,103.338 127.04,105.918 ; 119.38,128.143 120.142,128.143 121.92,126.365 121.92,125.643 ; 119.38,130.683 116.967,130.683 112.903,126.619 ; 119.38,133.223 122.682,133.223 124.587,135.128 124.587,136.866 127.167,139.446 ; 119.467,172.339 121.285,174.157 ; 119.594,205.867 121.412,207.685 ; 119.975,90.297 121.793,92.115 ; 120.102,123.825 121.92,125.643 ; 125.476,193.548 124.206,192.278 124.206,188.468 121.539,185.801 120.269,185.801 118.745,184.277 116.84,184.277 116.078,183.515 ; 125.603,227.076 124.333,225.806 124.333,221.996 121.666,219.329 120.396,219.329 118.872,217.805 116.967,217.805 116.205,217.043 ; 125.984,111.506 124.714,110.236 124.714,106.426 122.047,103.759 120.777,103.759 119.253,102.235 117.348,102.235 116.586,101.473 ; 126.111,145.034 124.841,143.764 124.841,139.954 122.174,137.287 120.904,137.287 119.38,135.763 117.475,135.763 116.713,135.001 ; 127.141,175.508 122.636,175.508 122.091,174.962 ; 127.141,182.008 132.605,182.008 133.985,183.388 ; 127.268,209.036 122.763,209.036 122.218,208.49 ; 127.268,215.536 132.732,215.536 134.112,216.916 ; 127.508,193.04 127.508,190.754 129.159,189.103 130.389,189.103 131.532,187.96 ; 127.635,226.568 127.635,224.282 129.286,222.631 130.516,222.631 131.659,221.488 ; 127.649,93.466 123.144,93.466 122.599,92.92 ; 127.649,99.966 133.113,99.966 134.493,101.346 ; 127.776,126.994 123.271,126.994 122.726,126.448 ; 127.776,133.494 133.24,133.494 134.62,134.874 ; 128.016,110.998 128.016,108.712 129.667,107.061 130.897,107.061 132.04,105.918 ; 128.143,144.526 128.143,142.24 129.794,140.589 131.024,140.589 132.167,139.446 ; 130.556,193.548 131.445,193.548 133.985,191.008 ; 130.683,227.076 131.572,227.076 134.112,224.536 ; 131.064,111.506 131.953,111.506 134.493,108.966 ; 131.191,145.034 132.08,145.034 134.62,142.494 ; 149.987,206.502 151.892,206.502 153.162,207.772 153.162,209.042 153.035,209.169 ; 150.241,211.836 153.67,211.836 154.686,210.82 156.464,210.82 156.718,211.074 157.861,211.074 162.052,215.265 162.052,217.678 ; 150.241,219.456 150.241,218.44 151.257,217.424 152.4,217.424 153.035,216.789 153.035,214.503 154.178,213.36 156.464,213.36 ; 150.495,124.46 152.4,124.46 153.67,125.73 153.67,127 153.543,127.127 ; 150.622,172.466 152.527,172.466 153.797,173.736 153.797,175.006 153.67,175.133 ; 150.749,129.794 154.178,129.794 155.194,128.778 156.972,128.778 157.226,129.032 158.369,129.032 162.56,133.223 162.56,135.636 ; 150.749,137.414 150.749,136.398 151.765,135.382 152.908,135.382 153.543,134.747 153.543,132.461 154.686,131.318 156.972,131.318 ; 150.876,177.8 154.305,177.8 155.321,176.784 157.099,176.784 157.353,177.038 158.496,177.038 162.687,181.229 162.687,183.642 ; 150.876,185.42 150.876,184.404 151.892,183.388 153.035,183.388 153.67,182.753 153.67,180.467 154.813,179.324 157.099,179.324 ; 151.13,90.424 153.035,90.424 154.305,91.694 154.305,92.964 154.178,93.091 ; 151.384,95.758 154.813,95.758 155.829,94.742 157.607,94.742 157.861,94.996 159.004,94.996 163.195,99.187 163.195,101.6 ; 151.384,103.378 151.384,102.362 152.4,101.346 153.543,101.346 154.178,100.711 154.178,98.425 155.321,97.282 157.607,97.282 ; 153.329,221.996 154.432,220.893 154.432,219.964 155.956,218.44 ; 153.67,226.06 155.194,227.584 155.194,229.489 ; 153.837,139.954 154.94,138.851 154.94,137.922 156.464,136.398 ; 153.964,187.96 155.067,186.857 155.067,185.928 156.591,184.404 ; 154.178,144.018 155.702,145.542 155.702,147.447 ; 154.305,192.024 155.829,193.548 155.829,195.453 ; 154.472,105.918 155.575,104.815 155.575,103.886 157.099,102.362 ; 154.813,109.982 156.337,111.506 156.337,113.411 ; 156.464,215.9 151.384,220.98 151.257,220.98 151.13,221.107 148.971,221.107 147.955,220.091 147.955,206.248 149.225,204.978 154.559,204.978 155.321,205.74 155.321,208.026 156.591,209.296 158.242,209.296 ; 156.972,133.858 151.892,138.938 151.765,138.938 151.638,139.065 149.479,139.065 148.463,138.049 148.463,124.206 149.733,122.936 155.067,122.936 155.829,123.698 155.829,125.984 157.099,127.254 158.75,127.254 ; 157.099,181.864 152.019,186.944 151.892,186.944 151.765,187.071 149.606,187.071 148.59,186.055 148.59,172.212 149.86,170.942 155.194,170.942 155.956,171.704 155.956,173.99 157.226,175.26 158.877,175.26 ; 157.607,99.822 152.527,104.902 152.4,104.902 152.273,105.029 150.114,105.029 149.098,104.013 149.098,90.17 150.368,88.9 155.702,88.9 156.464,89.662 156.464,91.948 157.734,93.218 159.385,93.218 ; 158.329,221.996 156.21,221.996 154.432,223.774 ; 158.837,139.954 156.718,139.954 154.94,141.732 ; 158.964,187.96 156.845,187.96 155.067,189.738 ; 159.472,105.918 157.353,105.918 155.575,107.696 ; 160.441,206.502 157.607,206.502 157.607,208.661 158.242,209.296 ; 160.949,124.46 158.115,124.46 158.115,126.619 158.75,127.254 ; 161.076,172.466 158.242,172.466 158.242,174.625 158.877,175.26 ; 161.29,226.06 160.401,225.171 160.401,219.329 162.052,217.678 ; 161.584,90.424 158.75,90.424 158.75,92.583 159.385,93.218 ; 161.798,144.018 160.909,143.129 160.909,137.287 162.56,135.636 ; 161.925,192.024 161.036,191.135 161.036,185.293 162.687,183.642 ; 162.179,229.489 157.734,229.489 157.734,225.298 156.21,223.774 154.432,223.774 ; 162.433,109.982 161.544,109.093 161.544,103.251 163.195,101.6 ; 162.687,147.447 158.242,147.447 158.242,143.256 156.718,141.732 154.94,141.732 ; 162.814,195.453 158.369,195.453 158.369,191.262 156.845,189.738 155.067,189.738 ; 163.322,113.411 158.877,113.411 158.877,109.22 157.353,107.696 155.575,107.696 ; 163.576,222.758 168.179,227.361 168.179,229.489 ; 164.084,140.716 168.687,145.319 168.687,147.447 ; 164.211,188.722 168.814,193.325 168.814,195.453 ; 164.719,106.68 169.322,111.283 169.322,113.411 ; 164.719,210.82 165.481,210.82 167.259,209.042 167.259,208.32 ; 164.719,213.36 162.306,213.36 158.242,209.296 ; 164.719,215.9 168.021,215.9 169.926,217.805 169.926,219.543 172.506,222.123 ; 165.227,128.778 165.989,128.778 167.767,127 167.767,126.278 ; 165.227,131.318 162.814,131.318 158.75,127.254 ; 165.227,133.858 168.529,133.858 170.434,135.763 170.434,137.501 173.014,140.081 ; 165.354,176.784 166.116,176.784 167.894,175.006 167.894,174.284 ; 165.354,179.324 162.941,179.324 158.877,175.26 ; 165.354,181.864 168.656,181.864 170.561,183.769 170.561,185.507 173.141,188.087 ; 165.441,206.502 167.259,208.32 ; 165.862,94.742 166.624,94.742 168.402,92.964 168.402,92.242 ; 165.862,97.282 163.449,97.282 159.385,93.218 ; 165.862,99.822 169.164,99.822 171.069,101.727 171.069,103.465 173.649,106.045 ; 165.949,124.46 167.767,126.278 ; 166.076,172.466 167.894,174.284 ; 166.584,90.424 168.402,92.242 ; 171.45,227.711 170.18,226.441 170.18,222.631 167.513,219.964 166.243,219.964 164.719,218.44 162.814,218.44 162.052,217.678 ; 171.958,145.669 170.688,144.399 170.688,140.589 168.021,137.922 166.751,137.922 165.227,136.398 163.322,136.398 162.56,135.636 ; 172.085,193.675 170.815,192.405 170.815,188.595 168.148,185.928 166.878,185.928 165.354,184.404 163.449,184.404 162.687,183.642 ; 172.593,111.633 171.323,110.363 171.323,106.553 168.656,103.886 167.386,103.886 165.862,102.362 163.957,102.362 163.195,101.6 ; 173.115,209.671 168.61,209.671 168.065,209.125 ; 173.115,216.171 178.579,216.171 179.959,217.551 ; 173.482,227.203 173.482,224.917 175.133,223.266 176.363,223.266 177.506,222.123 ; 173.623,127.629 169.118,127.629 168.573,127.083 ; 173.623,134.129 179.087,134.129 180.467,135.509 ; 173.75,175.635 169.245,175.635 168.7,175.089 ; 173.75,182.135 179.214,182.135 180.594,183.515 ; 173.99,145.161 173.99,142.875 175.641,141.224 176.871,141.224 178.014,140.081 ; 174.117,193.167 174.117,190.881 175.768,189.23 176.998,189.23 178.141,188.087 ; 174.258,93.593 169.753,93.593 169.208,93.047 ; 174.258,100.093 179.722,100.093 181.102,101.473 ; 174.625,111.125 174.625,108.839 176.276,107.188 177.506,107.188 178.649,106.045 ; 176.53,227.711 177.419,227.711 179.959,225.171 ; 177.038,145.669 177.927,145.669 180.467,143.129 ; 177.165,193.675 178.054,193.675 180.594,191.135 ; 177.673,111.633 178.562,111.633 181.102,109.093 ; 61.087,223.774 60.452,224.409 55.88,224.409 53.34,221.869 53.34,205.359 54.61,204.089 69.342,204.089 69.85,204.597 74.93,204.597 76.073,205.74 76.073,207.772 74.72,209.125 ; 61.595,141.732 60.96,142.367 56.388,142.367 53.848,139.827 53.848,123.317 55.118,122.047 69.85,122.047 70.358,122.555 75.438,122.555 76.581,123.698 76.581,125.73 75.228,127.083 ; 61.722,188.976 61.087,189.611 56.515,189.611 53.975,187.071 53.975,170.561 55.245,169.291 69.977,169.291 70.485,169.799 75.565,169.799 76.708,170.942 76.708,172.974 75.355,174.327 ; 73.914,208.32 74.72,209.125 ; 74.422,126.278 75.228,127.083 ; 74.549,173.522 75.355,174.327 ; 108.458,189.611 107.823,190.246 103.251,190.246 100.711,187.706 100.711,171.196 101.981,169.926 116.713,169.926 117.221,170.434 122.301,170.434 123.444,171.577 123.444,173.609 122.091,174.962 ; 108.585,223.139 107.95,223.774 103.378,223.774 100.838,221.234 100.838,204.724 102.108,203.454 116.84,203.454 117.348,203.962 122.428,203.962 123.571,205.105 123.571,207.137 122.218,208.49 ; 108.966,107.569 108.331,108.204 103.759,108.204 101.219,105.664 101.219,89.154 102.489,87.884 117.221,87.884 117.729,88.392 122.809,88.392 123.952,89.535 123.952,91.567 122.599,92.92 ; 109.093,141.097 108.458,141.732 103.886,141.732 101.346,139.192 101.346,122.682 102.616,121.412 117.348,121.412 117.856,121.92 122.936,121.92 124.079,123.063 124.079,125.095 122.726,126.448 ; 121.285,174.157 122.091,174.962 ; 121.412,207.685 122.218,208.49 ; 121.793,92.115 122.599,92.92 ; 121.92,125.643 122.726,126.448 ; 154.432,223.774 153.797,224.409 149.225,224.409 146.685,221.869 146.685,205.359 147.955,204.089 162.687,204.089 163.195,204.597 168.275,204.597 169.418,205.74 169.418,207.772 168.065,209.125 ; 154.94,141.732 154.305,142.367 149.733,142.367 147.193,139.827 147.193,123.317 148.463,122.047 163.195,122.047 163.703,122.555 168.783,122.555 169.926,123.698 169.926,125.73 168.573,127.083 ; 155.067,189.738 154.432,190.373 149.86,190.373 147.32,187.833 147.32,171.323 148.59,170.053 163.322,170.053 163.83,170.561 168.91,170.561 170.053,171.704 170.053,173.736 168.7,175.089 ; 155.575,107.696 154.94,108.331 150.368,108.331 147.828,105.791 147.828,89.281 149.098,88.011 163.83,88.011 164.338,88.519 169.418,88.519 170.561,89.662 170.561,91.694 169.208,93.047 ; 167.259,208.32 168.065,209.125 ; 167.767,126.278 168.573,127.083 ; 167.894,174.284 168.7,175.089 ; 168.402,92.242 169.208,93.047

## Polygon pours and split planes (outlines as drawn)
no net on Bottom Layer "Bottom Layer-No Net" (solid, pour order 25): 145.669,197.739 183.261,197.739 183.261,168.783 145.669,168.783
no net on Bottom Layer "Bottom Layer-No Net" (solid, pour order 40): 52.324,196.977 89.916,196.977 89.916,168.021 52.324,168.021
no net on Bottom Layer "Bottom Layer-No Net" (solid, pour order 25): 99.06,197.612 136.652,197.612 136.652,168.656 99.06,168.656
no net on Bottom Layer "Bottom Layer-No Net" (solid, pour order 25): 51.689,231.775 89.281,231.775 89.281,202.819 51.689,202.819
no net on Bottom Layer "Bottom Layer-No Net" (solid, pour order 25): 99.187,231.14 136.779,231.14 136.779,202.184 99.187,202.184
no net on Bottom Layer "Bottom Layer-No Net" (solid, pour order 25): 145.034,231.775 182.626,231.775 182.626,202.819 145.034,202.819
no net on Bottom Layer "Bottom Layer-No Net" (solid, pour order 25): 145.542,149.733 183.134,149.733 183.134,120.777 145.542,120.777
no net on Bottom Layer "Bottom Layer-No Net" (solid, pour order 25): 99.695,149.098 137.287,149.098 137.287,120.142 99.695,120.142
no net on Bottom Layer "Bottom Layer-No Net" (solid, pour order 25): 52.197,149.733 89.789,149.733 89.789,120.777 52.197,120.777
no net on Bottom Layer "Bottom Layer-No Net" (solid, pour order 25): 99.568,115.57 137.16,115.57 137.16,86.614 99.568,86.614
GND on Bottom Layer "Bottom Layer-No Net" (solid, pour order 40): 52.832,114.935 90.424,114.935 90.424,85.979 52.832,85.979
no net on Bottom Layer "Bottom Layer-No Net" (solid, pour order 25): 146.177,115.697 183.769,115.697 183.769,86.741 146.177,86.741

## Keep-outs
Keep-Out Layer:
  lines w0.3: -0.508,128.016 -0.508,163.195 ; 0.127,85.09 0.127,120.269 ; 51.689,202.819 51.689,231.775 89.281,231.775 89.281,202.819 51.689,202.819 ; 52.197,120.777 89.789,120.777 89.789,149.733 52.197,149.733 52.197,120.777 ; 52.324,168.021 52.324,196.977 89.916,196.977 89.916,168.021 52.324,168.021 ; 52.832,85.979 90.424,85.979 90.424,114.935 52.832,114.935 52.832,85.979 ; 99.06,168.656 99.06,197.612 136.652,197.612 136.652,168.656 99.06,168.656 ; 99.187,202.184 99.187,231.14 136.779,231.14 136.779,202.184 99.187,202.184 ; 99.568,86.614 137.16,86.614 137.16,115.57 99.568,115.57 99.568,86.614 ; 99.695,120.142 137.287,120.142 137.287,149.098 99.695,149.098 99.695,120.142 ; 145.034,202.819 145.034,231.775 182.626,231.775 182.626,202.819 145.034,202.819 ; 145.542,120.777 183.134,120.777 183.134,149.733 145.542,149.733 145.542,120.777 ; 145.669,168.783 183.261,168.783 183.261,197.739 145.669,197.739 145.669,168.783 ; 146.177,86.741 146.177,115.697 183.769,115.697 183.769,86.741 146.177,86.741